# Altium PCB project_1_1.PcbDoc
Units mil, origin at the board's own origin, x right, y up, seen from the top; angles counter-clockwise.
Board outline 3660.31 x 1534.33 mil, 2 copper layers (Top Layer, Bottom Layer); 14 components, 18 nets, 96 pads, 10 vias.
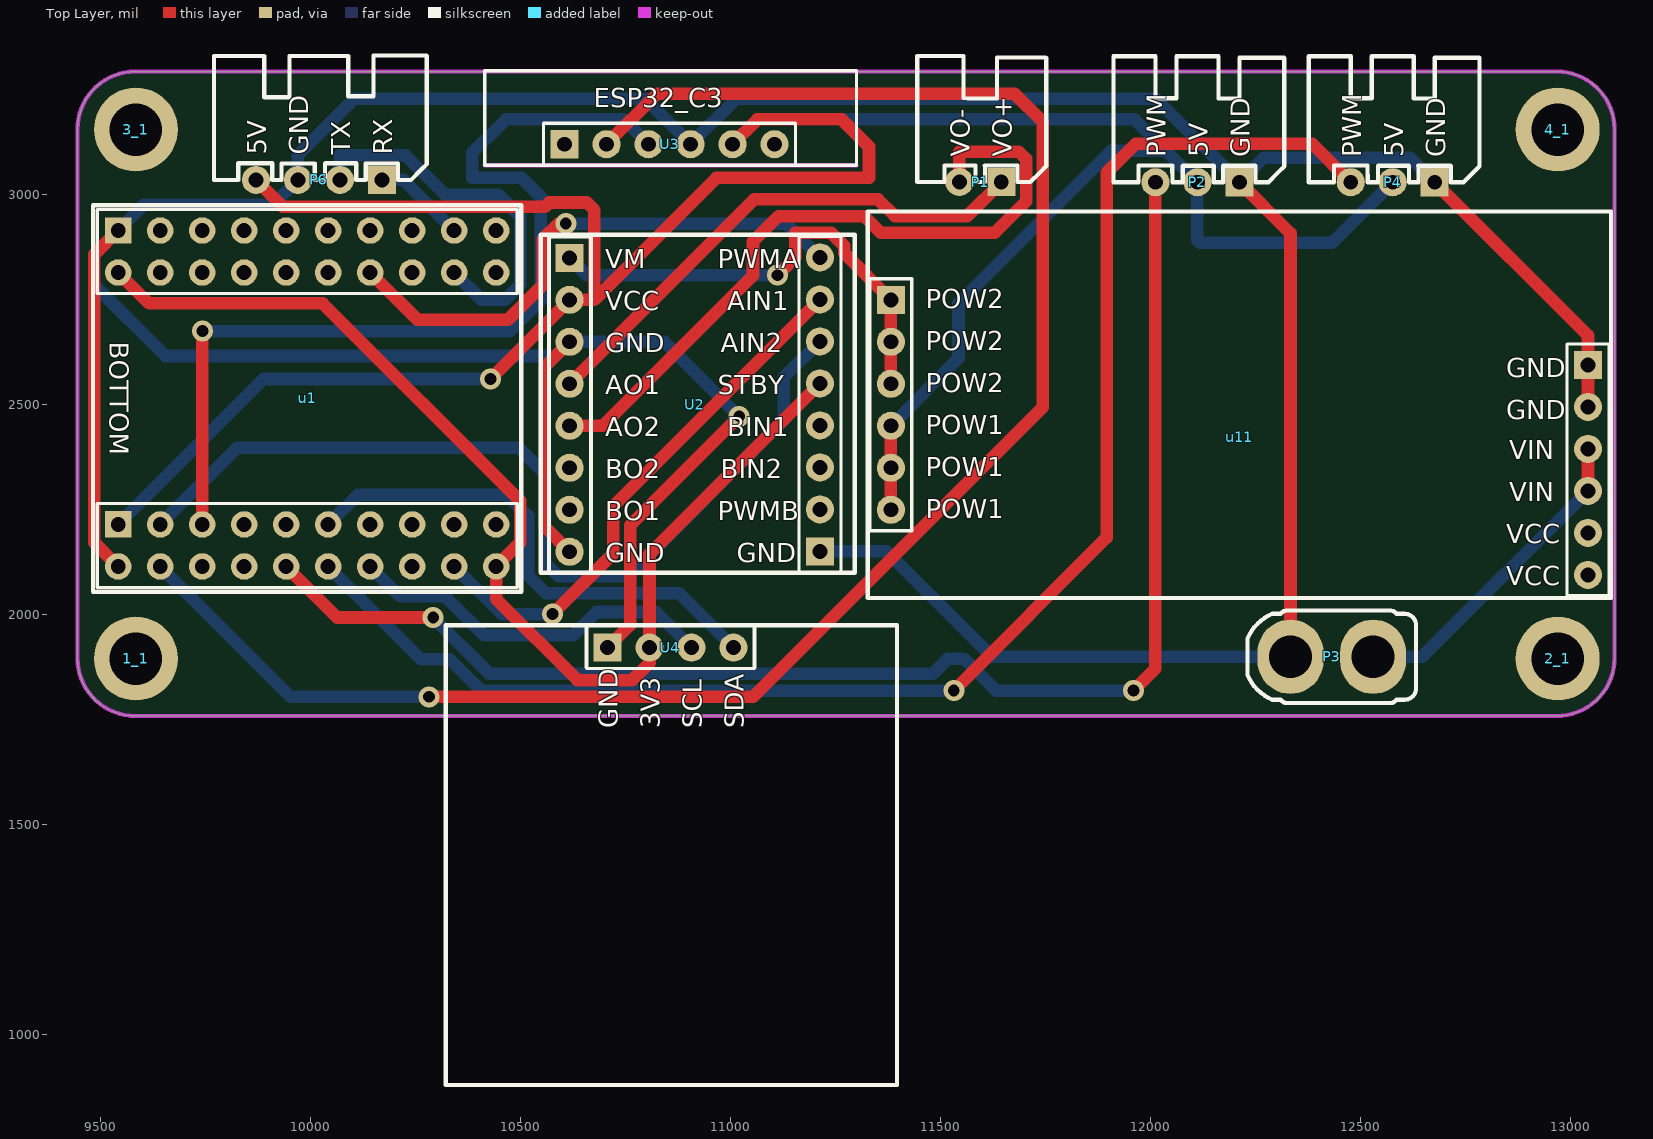
[diagram p0: Top Layer view]
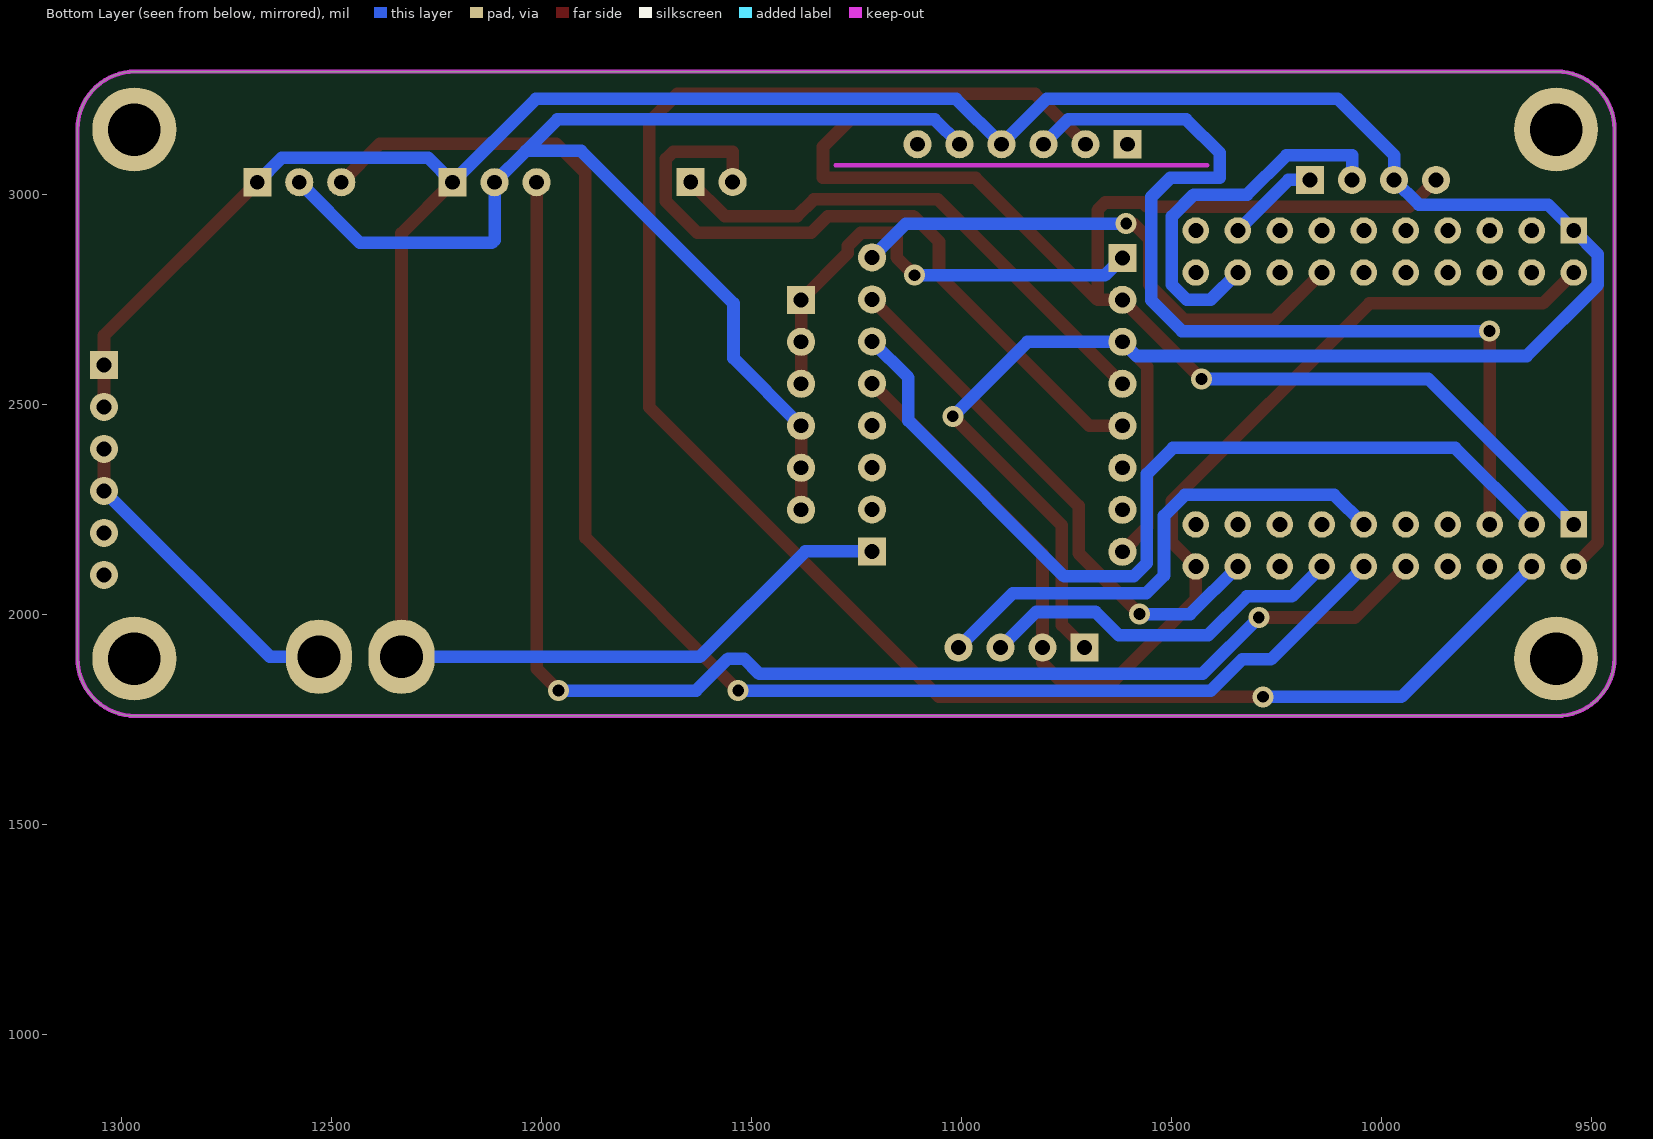
[diagram p1: Bottom Layer view, seen from below]

## Layer stack, top to bottom
Top Solder: solder mask 0.4, Solder Resist, Dk 3.5
Top Layer: signal copper 1.4
Dielectric 1: dielectric 12.6, FR-4, Dk 4.8
Bottom Layer: signal copper 1.4
Bottom Solder: solder mask 0.4, Solder Resist, Dk 3.5

## Board outline
9445,1895.88 9445,3155.73 cw(c9582.24,3155.73) 9582.24,3292.97 12968.07,3292.97 cw(c12968.07,3155.73) 13105.31,3155.73 13105.31,1895.88 cw(c12968.07,1895.88) 12968.07,1758.64 9582.24,1758.64 cw(c9582.24,1895.88)

## Design rules (kind name [scope] priority, off if disabled: settings)
Clearance [All] p1: gap=10 ignorepadtopadclearanceinfootprint=FALSE
PolygonConnect [All] p1: connectstyle=Relief reliefconductorwidth=10 reliefentries=4 polygonreliefangle="90 Angle" airgapwidth=10
RoutingVias [All] p1: holewidth=28 width=50 viastyle="Through Hole" minholewidth=28 minwidth=50 maxholewidth=28 maxwidth=50
SolderMaskExpansion [All] p1: expansion=4 istentingtop=FALSE
SupplyNets "Schematic Supply Nets_5" [InNet('5V')] p1: voltage=0.000
SupplyNets "Schematic Supply Nets_3" [InNet('12V')] p2: voltage=0.000
SupplyNets "Schematic Supply Nets_2" [InNet('VIN+')] p3: voltage=0.000
SupplyNets "Schematic Supply Nets_1" [InNet('GND')] p4: voltage=0.000
SupplyNets "Schematic Supply Nets" [InNet('3V3')] p5: voltage=0.000
Width [All] p1: maxlimit=100 minlimit=30 preferedwidth=30 minimp=50.000000 maximp=50.000000 favimp=50.000000
30 further rules are at their usual default settings.

## Classes and differential pairs
component class project_7: P1 P2 P3 P4 P6 u1 U2 U3 U4 u11

## Components (designator, comment, footprint, x,y, rotation, side; value= is the part's Value field where it differs from the comment)
1_1 "M3" "M3 125X200" 9584.17,1895.16 r90 top (schematic designator 1)
2_1 "M3" "M3 125X200" 12970,1895.16 r90 top (schematic designator 2)
3_1 "M3" "M3 125X200" 9584.17,3155 r90 top (schematic designator 3)
4_1 "M3" "M3 125X200" 12970,3155 r90 top (schematic designator 4)
P1 "port_mot_2p" XH2.54_2P 11590,3155 r0 top
P2 "port_pwm_3p" XH2.54_3P 12127.04,3164.49 r0 top
P3 "port_xt30" MOD_XT30 12432.04,1899.49 r180 top
P4 "port_pwm_3p" XH2.54_3P 12592.04,3164.49 r0 top
P6 "port_uart_4p" XH2.54_4P 10025,3190 r0 top
u1 "f1_hw_1" f1_hw_1 9982.04,2529.49 r270 top
U2 "mod_tb6612" MOD_TB6612 10922.04,2499.49 r0 top
U3 "c3_hw_1" C3_HW_1 10855,3120 r0 top
U4 "mod_oled" mod_oled 10862.04,1919.49 r0 top
u11 "pow_hw_2" pow_hw_2 12157.04,2519.49 r0 top

## Footprints (in the part's own frame and the unit in brackets; to place one, negate y for a bottom-side part, rotate by r counter-clockwise, add the part's x,y. Pads: shape width x height; smd on the part's side, far side on the other; paste and mask are expansions set on the pad)
C3_HW_1 [mm]
  rect 1.7x1.7 hole 0.9: 1(-6.35,0)
  round 1.7 hole 0.9: 2(-3.81,0) 3(-1.27,0) 4(1.27,0) 5(3.81,0) 6(6.35,0)
  Keep-Out Layer lines w0.254: -11.176,-1.27 11.303,-1.27
  silkscreen extent -11.18,-1.27 11.3,4.44, body extent -11.18,-1.27 11.3,4.44, height 8.5
f1_hw_1 [mm] "f1_hw_1"
  rect 1.6x1.6 hole 0.9: 1(-9.779,-11.176) 21(8.001,-11.176)
  round 1.6 hole 0.9: 2(-7.239,-11.176) 3(-9.779,-8.636) 4(-7.239,-8.636) 5(-9.779,-6.096) 6(-7.239,-6.096) 7(-9.779,-3.556) 8(-7.239,-3.556) 9(-9.779,-1.016) 10(-7.239,-1.016) 11(-9.779,1.524) 12(-7.239,1.524) 13(-9.779,4.064) 14(-7.239,4.064) 15(-9.779,6.604) 16(-7.239,6.604) 17(-9.779,9.144) 18(-7.239,9.144) 19(-9.779,11.684) 20(-7.239,11.684) 22(10.541,-11.176) 23(8.001,-8.636) 24(10.541,-8.636) 25(8.001,-6.096) 26(10.541,-6.096) 27(8.001,-3.556) 28(10.541,-3.556) 29(8.001,-1.016) 30(10.541,-1.016) 31(8.001,1.524) 32(10.541,1.524) 33(8.001,4.064) 34(10.541,4.064) 35(8.001,6.604) 36(10.541,6.604) 37(8.001,9.144) 38(10.541,9.144) 39(8.001,11.684) 40(10.541,11.684)
  silkscreen extent -11.3,-12.7 12.07,13.21, body extent -11.3,-12.7 12.07,13.21, height 8.5
"M3 125X200" [mil] "M3螺丝孔，孔125Mil，焊盘200Mil"
  round 200 hole 125: 1(0,0)
mod_oled [mm] "外购屏幕模块接口"
  rect 1.7x1.7 hole 0.9: 1(-3.935,0.047)
  round 1.7 hole 0.9: 2(-1.395,0.047) 3(1.145,0.047) 4(3.685,0.047)
  silkscreen extent -13.72,-26.4 13.58,1.4, body extent -13.72,-26.42 13.59,1.4, height 8.5
MOD_TB6612 [mm]
  rect 1.7x1.7 hole 0.9: 1(-7.747,8.89) 16(7.391,-8.867)
  round 1.7 hole 0.9: 2(-7.747,6.35) 3(-7.747,3.81) 4(-7.747,1.27) 5(-7.747,-1.27) 6(-7.747,-3.81) 7(-7.747,-6.35) 8(-7.747,-8.89) 9(7.391,8.913) 10(7.391,6.373) 11(7.391,3.833) 12(7.391,1.293) 13(7.391,-1.247) 14(7.391,-3.787) 15(7.391,-6.327)
  silkscreen extent -9.5,-10.16 9.5,10.29, body extent -9.5,-10.16 9.5,10.29, height 8.5
MOD_XT30 [mm]
  oval 4x4.5 hole 2.6: 1(-2.5,0) 2(2.5,0)
  silkscreen extent -5.1,-2.8 5.1,2.8, body extent -5.1,-2.8 5.1,2.8, height 10.71
pow_hw_2 [mm] "pow_hw_2"
  round 1.7 hole 0.9: 0(22.479,-10.795) 0(22.479,-8.255) 1(22.479,-5.715) 1(22.479,-3.175) 2(22.479,-0.635) 3(-19.685,-6.858) 3(-19.685,-4.318) 3(-19.685,-1.778) 4(-19.685,0.762) 4(-19.685,3.302)
  rect 1.7x1.7 hole 0.9: 2(22.479,1.905) 4(-19.685,5.842)
  silkscreen extent -21.08,-12.19 23.88,11.18, body extent -21.08,-12.19 23.88,11.18, height 8.5
XH2.54_2P [mm]
  rect 1.7x1.7 hole 0.9: 1(1.397,-3.175)
  round 1.7 hole 0.9: 2(-1.143,-3.175)
  silkscreen extent -3.68,-3.17 4.11,4.44, body extent -3.64,-3.52 3.9,4.17, height 5.73
XH2.54_3P [mm]
  rect 1.7x1.7 hole 0.9: 1(2.159,-3.429)
  round 1.7 hole 0.9: 2(-0.381,-3.429) 3(-2.921,-3.429)
  silkscreen extent -5.46,-3.43 4.88,4.19, body extent -5.42,-3.78 4.66,3.92, height 5.73
XH2.54_4P [mm]
  rect 1.7x1.7 hole 0.9: 1(3.683,-3.937)
  round 1.7 hole 0.9: 2(1.143,-3.937) 3(-1.397,-3.937) 4(-3.937,-3.937)
  silkscreen extent -6.48,-3.94 6.4,3.59, body extent -6.44,-4.29 6.18,3.41, height 5.73

## Part data
1_1 2_1 3_1 4_1: "铜柱孔"
P1: "开环直流电机接口 / XH2.54弯排针2p"
P2 P4: "舵机接口 / XH2.54弯排针3p"
P3: "XT30"
P6: "串口接口/SPP蓝牙模块 / XH2.54弯排针4p/4p排母"
u1: "F103C8T6最小系统_1"
U2: "TB6612模块 / 8p排母*2"
U3: "ESP32C3蓝牙模块 / 6p排母"
U4: "外购屏幕模块"
u11: "两路升降压电源模块 / 6p排母*2"

## Via types
v1: diameter 50, hole 28, Top Layer to Bottom Layer, 10 vias

## Nets (pads, with @x,y where several pads share a name; then routed paths per layer and width w, separated by ;. In a path a pad name is that pad's centre, name@x,y a point inside that pad or via, vN(x,y) a via of type N, cw(c..) or ccw(c..) an arc to the next point about the centre after c; other vN are vias at no path point)
3V3: u1.2 u1.40 U2.12 U4.2 | length 2735
  Top Layer w30: u1.2 9615.53,2741 10029,2741 10499,2271 10499,2171.45 u1.40 10442.04,2037.31 10635.35,1844 10766.13,1844 10807.13,1885 U4.2 10807.13,2144.5 U2.12
5V: P2.2 P4.2 P6.4 u1.21 U2.2 U3.5 u11.3 | length 6700.2
  Top Layer w30: P6.4 9934,2971 10558,2971 10568.21,2981.21 10658,2981.21 10676,2963.21 10676,2749.49 ; v1(10428.55,2561) U2.2 10676,2749.49 ; U3.5 11064,3179 11265,3179 11330,3114 11330,3040 10966.51,3040 10676,2749.49 ; u11.3@11382.04,2249.49 11382.04,2349.49 u11.3@11382.04,2449.49
  Bottom Layer w30: u1.21 9888.55,2561 v1(10428.55,2561) ; U3.5 11064,3179 11962.53,3179 12037.53,3104 ; u11.3@11382.04,2449.49 11543,2610.45 11543,2741 11906,3104 12037.53,3104 ; P4.2 12432.55,2885 12118.55,2885 12112.04,2891.51 P2.2 12037.53,3104
12V: U2.1 u11.4 | length 1134.3
  Top Layer w30: v1(11112,2808) 11154.56,2850.56 11154.56,2908.86 11240,2908.86 11271,2877.86 11271,2860.53 11382.04,2749.49 11382.04,2649.49 u11.4@11382.04,2549.49
  Bottom Layer w30: U2.1 10658.53,2808 v1(11112,2808)
AIN1: u1.38 U2.10 | length 1294.2
  Top Layer w30: v1(10576,2001) 10721,2146 10721,2258.37 U2.10
  Bottom Layer w30: u1.38 10455.53,2001 v1(10576,2001)
AIN2: u1.23 U2.11 | length 2189.3
  Bottom Layer w30: u1.23 9824.55,2397 10496.57,2397 10558.57,2335 10558.57,2122.45 10590,2091.02 10755.71,2091.02 11126.63,2461.94 11126.63,2564 U2.11
AO1: P1.1 U2.4 | length 1260.1
  Top Layer w30: U2.4 11056.41,2988.86 11351.49,2988.86 11391.49,2948.86 11563.86,2948.86 P1.1
AO2: P1.2 U2.5 | length 1727.7
  Top Layer w30: U2.5 10695.63,2449.49 11053.67,2807.53 11053.67,2887.97 11114.56,2948.86 11318.34,2948.86 11358.34,2908.86 11628.86,2908.86 11704,2984 11704,3085 11687,3102 11545,3102 P1.2
GND: P2.1 P3.2 P4.1 P6.3 u1.1 u1.22 U2.3 U2.8 U2.16 U3.4 U4.1 u11.2 | length 10534.5
  Top Layer w30: u1.22 9485,2171.53 9485,2857.45 u1.1 ; U2.8 10558,2208.53 10558,2590.45 U2.3 ; U4.1 10761,1975.21 10761,2212.12 v1(11020.88,2472) ; P2.1 12333.61,2907.91 P3.2 ; P4.1 13042.04,2664.49 13042.04,2594.49 u11.2@13042.04,2494.49
  Bottom Layer w30: v1(11020.88,2472) 10843.39,2649.49 U2.3 10583.24,2615.69 9654.31,2615.69 9485,2785 9485,2857.45 u1.1 9603.55,2976 9911,2976 P6.3 9970,3094 10104.47,3228.47 10796.53,3228.47 U3.4 11013,3228 12013.53,3228 P2.1 12270.55,3088 12618.53,3088 P4.1 ; U2.16 11372.05,2150.39 11622.96,1899.49 P3.2
PWM1: P2.3 u1.30 | length 3402.2
  Top Layer w30: u1.30 10063.53,1993 v1(10292,1993) ; v1(11960,1819) 12012.04,1871.04 P2.3
  Bottom Layer w30: v1(10292,1993) 10426,1859 11482,1859 11518,1895 11556,1895 11632,1819 v1(11960,1819)
PWM2: P4.3 u1.32 | length 3643.7
  Top Layer w30: v1(11532,1819) 11896,2183 11896,3052 11965,3121 12385.53,3121 P4.3
  Bottom Layer w30: u1.32 10263.31,1893.22 10331.93,1893.22 10406.15,1819 v1(11532,1819)
PWMA: u1.14 U2.9 | length 1309.7
  Top Layer w30: u1.14 10254.53,2702 10470,2702 10553,2785 10553,2894 10590,2931 v1(10608,2931)
  Bottom Layer w30: v1(10608,2931) 11132.42,2931 U2.9
RX1: u1.25 U3.3 | length 2261.4
  Top Layer w30: u1.25 9742.04,2674.04 v1(9743,2675)
  Bottom Layer w30: v1(9743,2675) 10475,2675 10548.09,2748.09 10548.09,2994.91 10503,3040 10385,3040 10385,3099 10465,3179 10746,3179 U3.3
RX2: P6.1 u1.17 | length 222
  Bottom Layer w30: P6.1 10221.53,3035 u1.17
SCL: u1.34 U4.3 | length 890.7
  Bottom Layer w30: u1.34 10213.22,2043.31 10320.22,2043.31 10412.53,1951 10626,1951 10681.02,2006.02 10822.44,2006.02 U4.3
SDA: u1.31 U4.4 | length 1228.1
  Bottom Layer w30: u1.31 10112.55,2285 10468,2285 10518,2235 10518,2093 10559.98,2051.02 10877.44,2051.02 U4.4
TX1: u1.24 U3.2 | length 4311.8
  Top Layer w30: v1(10282,1804) 11054,1804 11744,2494 11744,3173 11677,3240 10825,3240 U3.2
  Bottom Layer w30: u1.24 9952.53,1804 v1(10282,1804)
TX2: P6.2 u1.18 | length 908.9
  Bottom Layer w30: P6.2 10070,3093.47 10226.53,3093.47 10320,3000 10447,3000 10499,2948 10499,2785 10464,2750 10406.53,2750 u1.18
VIN+: P3.1 u11.1 | length 775.2
  Top Layer w30: u11.1@13042.04,2294.49 u11.1@13042.04,2394.49
  Bottom Layer w30: P3.1 12647.04,1899.49 u11.1@13042.04,2294.49
pads on no net: 1_1.1 2_1.1 3_1.1 4_1.1 u1.3 u1.4 u1.5 u1.6 u1.7 u1.8 u1.9 u1.10 u1.11 u1.12 u1.13 u1.15 u1.16 u1.19 u1.20 u1.26 u1.27 u1.28 u1.29 u1.33 u1.35 u1.36 u1.37 u1.39 U2.6 U2.7 U2.13 U2.14 U2.15 U3.1 U3.6 u11.0

## Keep-outs
Keep-Out Layer:
  the board outline again, w10

## Text inside footprints (layer, text, board x,y; h text height)
P1: Top Overlay "VO+" at 11670,3090 h45 r90; Top Overlay "VO-" at 11570,3090 h45 r90
P2: Top Overlay "GND" at 12237.04,3089.49 h45 r90; Top Overlay "5V" at 12137.04,3089.49 h45 r90; Top Overlay "PWM" at 12037.04,3089.49 h45 r90
P4: Top Overlay "GND" at 12702.04,3089.49 h45 r90; Top Overlay "5V" at 12602.04,3089.49 h45 r90; Top Overlay "PWM" at 12502.04,3089.49 h45 r90
P6: Top Overlay "RX" at 10195,3095 h45 r90; Top Overlay "TX" at 10095,3095 h45 r90; Top Overlay "GND" at 9995,3095 h45 r90; Top Overlay "5V" at 9895,3095 h45 r90
u1: Top Overlay "BOTTOM" at 9522.04,2649.49 h45 r270
U2: Top Overlay "VM" at 10702.04,2824.49 h45; Top Overlay "VCC" at 10702.04,2724.49 h45; Top Overlay "AO1" at 10702.04,2524.49 h45; Top Overlay "AO2" at 10702.04,2424.49 h45; Top Overlay "BO1" at 10702.04,2224.49 h45; Top Overlay "BO2" at 10702.04,2324.49 h45; Top Overlay "GND" at 10702.04,2124.49 h45; Top Overlay "GND" at 10702.04,2624.49 h45; Top Overlay "PWMA" at 10969.54,2824.49 h45; Top Overlay "AIN1" at 10992.03,2724.49 h45; Top Overlay "AIN2" at 10977.04,2624.49 h45; Top Overlay "STBY" at 10969.54,2524.49 h45; Top Overlay "BIN1" at 10992.03,2424.49 h45; Top Overlay "BIN2" at 10977.04,2324.49 h45; Top Overlay "PWMB" at 10969.54,2224.49 h45; Top Overlay "GND" at 11014.53,2124.49 h45
U3: Top Overlay "ESP32_C3" at 10675,3207.5 h45
U4: Top Overlay "GND" at 10732.04,1729.49 h45 r90; Top Overlay "SDA" at 11032.04,1729.49 h45 r90; Top Overlay "SCL" at 10932.04,1729.49 h45 r90; Top Overlay "3V3" at 10832.04,1729.49 h45 r90
u11: Top Overlay "POW1" at 11464.66,2229.49 h45; Top Overlay "POW1" at 11464.66,2329.49 h45; Top Overlay "POW1" at 11464.66,2429.49 h45; Top Overlay "POW2" at 11464.66,2529.49 h45; Top Overlay "POW2" at 11464.66,2629.49 h45; Top Overlay "POW2" at 11464.66,2729.49 h45; Top Overlay "GND" at 12847.04,2464.49 h45; Top Overlay "GND" at 12847.04,2564.49 h45; Top Overlay "VIN" at 12854.54,2269.49 h45; Top Overlay "VIN" at 12854.54,2369.49 h45; Top Overlay "VCC" at 12847.04,2069.49 h45; Top Overlay "VCC" at 12847.04,2169.49 h45